# Altium PCB PCB_FFC.PcbDoc
Units mm, origin at the board's own origin, x right, y up, seen from the top; angles counter-clockwise.
Board outline 37 x 16 mm, 2 copper layers (Top Layer, Bottom Layer); 3 components, 18 nets, 46 pads, 29 vias.
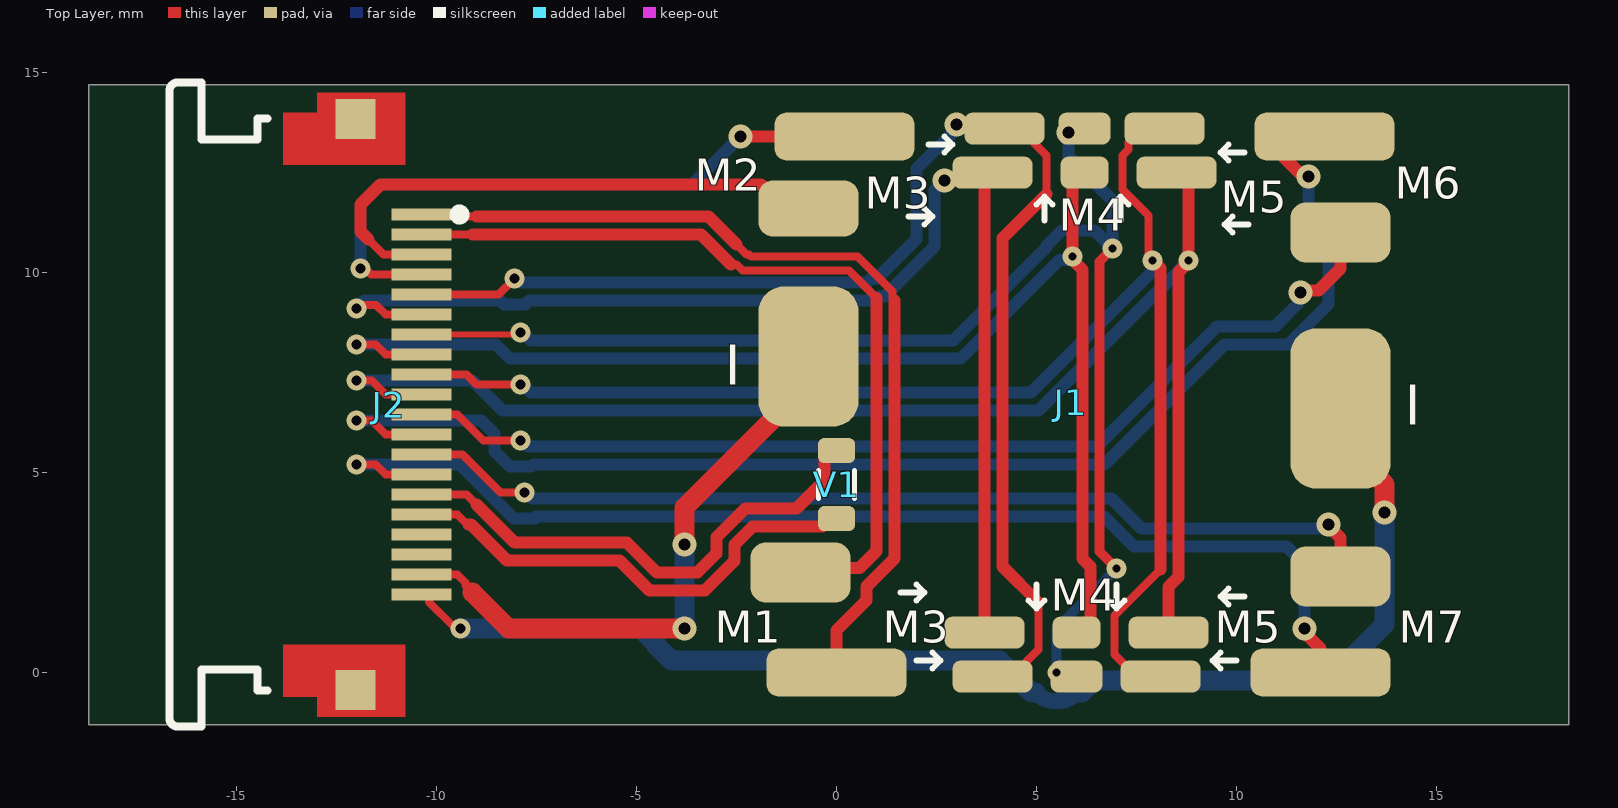
[diagram p0: Top Layer view]
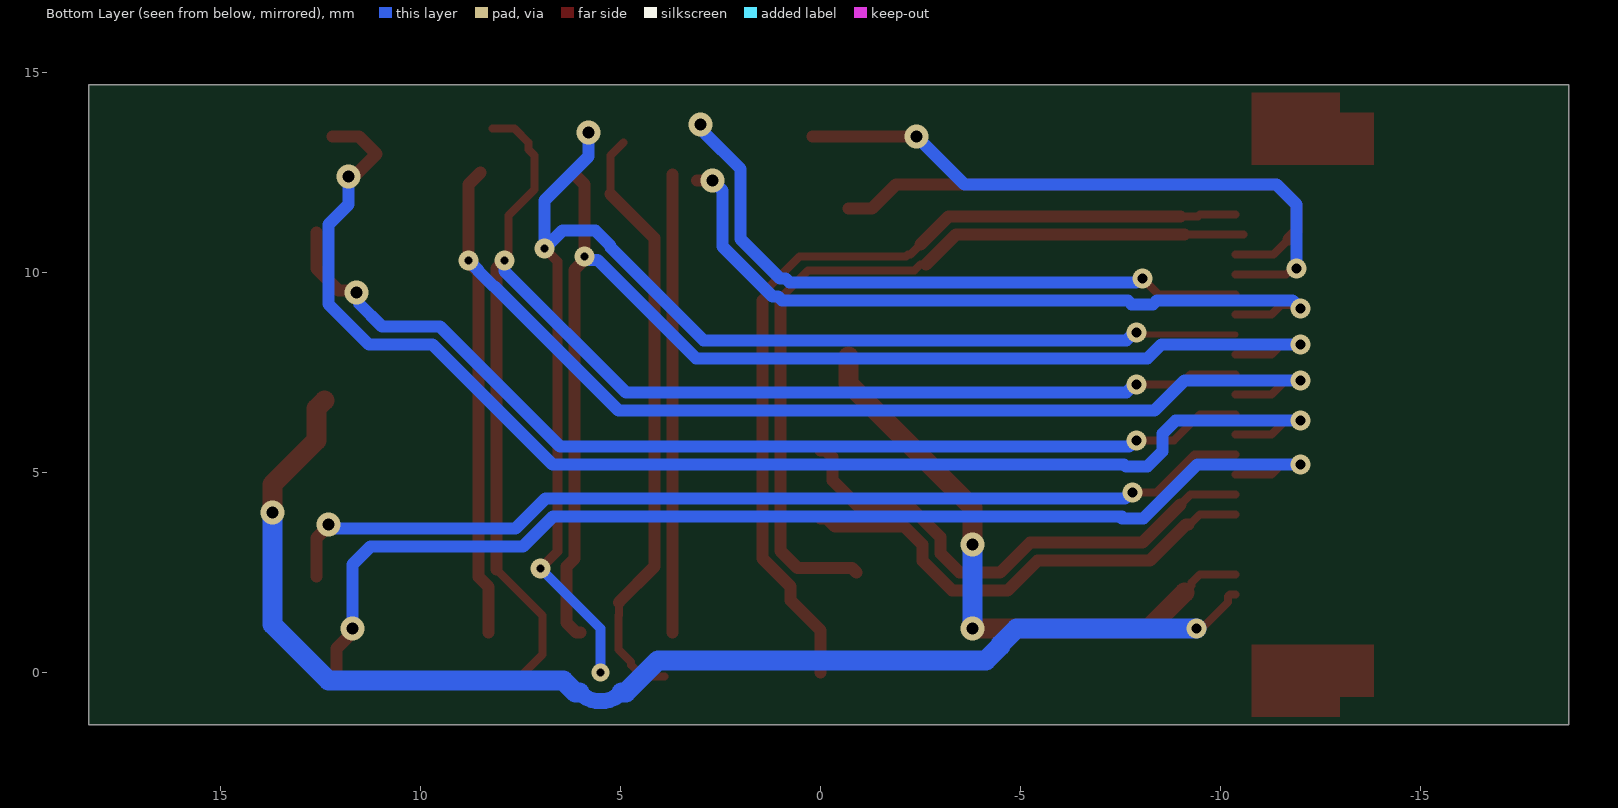
[diagram p1: Bottom Layer view, seen from below]

## Layer stack, top to bottom
Top Solder: solder mask 0.01, Solder Resist, Dk 3.5
Top Layer: signal copper 0.036
Dielectric 1: dielectric 0.32, FR-4, Dk 4.8
Bottom Layer: signal copper 0.036
Bottom Solder: solder mask 0.01, Solder Resist, Dk 3.5

## Board outline
-18.7,14.7 18.3,14.7 18.3,-1.3 -18.7,-1.3

## Design rules (kind name [scope] priority, off if disabled: settings)
Clearance [All] p1: gap=0.25 ignorepadtopadclearanceinfootprint=FALSE except(0: Arc-Hole Track-Hole SMDPad-Hole THPad-Hole Via-Hole Fill-Hole Poly-Hole Region-Hole Text-Hole; 0.15: Arc-Arc Arc-Track Track-Track; 0.2: SMDPad-SMDPad)
HoleSize [All] p1: absolutevalues=TRUE maxlimit=6.3 minlimit=0.2 maxpercent=80.000 minpercent=20.000
MinimumAnnularRing [All] p1: minimumring=0.13
MinimumSolderMaskSliver [All] p1 off: minsoldermaskwidth=0.254
PolygonConnect [All] p1: connectstyle=Relief reliefconductorwidth=0.254 reliefentries=4 polygonreliefangle="90 Angle" airgapwidth=0.254
RoutingVias [All] p1: holewidth=0.3 width=0.6 viastyle="Through Hole" minholewidth=0.2 minwidth=0.45 maxholewidth=6.3 maxwidth=6.7
SilkToSilkClearance [All] p1: silktosilkclearance=0.15
SilkToSolderMaskClearance [IsPad] p1: minsilkscreentomaskgap=0.15 clearancetoexposedcopper=TRUE
SolderMaskExpansion [All] p1: expansion=0.102 istentingtop=FALSE useseparateexpansions=TRUE expansionbottom=0.102 istentingbottom=TRUE
Width [All] p1: maxlimit=0.5 minlimit=0.15 preferedwidth=0.3 minimp=50.000000 maximp=50.000000 favimp=50.000000
26 further rules are at their usual default settings.

## Classes and differential pairs
net class [1..16]: 1 2 3 4 5 6 7 8 9 10 11 12 13 14 15 16

## Components (designator, comment, footprint, x,y, rotation, side; value= is the part's Value field where it differs from the comment)
J1 "sample_contact_place" sample 5.9,6.7 r0 top
J2 "52745-2097" MOLX-52745-2097 -11.2,6.7 r270 top
V1 "Varicap" DIOC160X80X70L20N 0,4.7 r90 top

## Footprints (in the part's own frame and the unit in brackets; to place one, negate y for a bottom-side part, rotate by r counter-clockwise, add the part's x,y. Pads: shape width x height; smd on the part's side, far side on the other; paste and mask are expansions set on the pad)
DIOC160X80X70L20N [mm] "Diode, Chip; 1.60 mm L X 0.80 mm W X 0.70 mm H body"
  rrect51% 0.63x0.93 smd: A(0.85,0) C(-0.85,0)
  silkscreen extent -0.36,-0.45 0.36,0.45, body extent -0.8,-0.4 0.8,0.4, height 0.7
MOLX-52745-2097 [mm] "FPC Connector, 20-Leads, Right Angle, Pitch 0.5 mm, Mated Height 2.0 mm, SMT"
  rect 0.3x1.5 smd: 1(-4.75,0.824) 2(-4.25,0.824) 3(-3.75,0.824) 4(-3.25,0.824) 5(-2.75,0.824) 6(-2.25,0.824) 7(-1.75,0.824) 8(-1.25,0.824) 9(-0.75,0.824) 10(-0.25,0.824) 11(0.25,0.824) 12(0.75,0.824) 13(1.25,0.824) 14(1.75,0.824) 15(2.25,0.824) 16(2.75,0.824) 17(3.25,0.824) 18(3.75,0.824) 19(4.25,0.824) 20(4.75,0.824)
  rect 1x1 smd: MP1(-7.134,-0.824) MP2(7.134,-0.824)
  Top Layer region: -7.8,0.424 -6,0.424 -6,-2.626 -7.3,-2.626 -7.3,-1.777 -7.8,-1.777
  Top Layer region: 6,0.424 7.8,0.424 7.8,-1.777 7.3,-1.777 7.3,-2.626 6,-2.626
  silkscreen extent -8.05,-5.48 8.05,1.9, body extent -8.05,-5.48 8.05,0.92, height 2.01
sample [mm]
  rrect50% 3.5x1.2 smd: 1(-5.9,-6.7) 4(-5.7,6.7) 12(6.3,6.7) 14(6.2,-6.7)
  rrect50% 2.5x1.5 smd: 2(-6.8,-4.2) 11(6.7,4.3) 13(6.7,-4.3)
  rrect50% 2.5x1.4 smd: 3(-6.6,4.9)
  rrect50% 2x0.8 smd: 5(-2,-6.8) 5(-1.7,6.9) 6(-2.2,-5.7) 6(-2,5.8) 9(2.2,-6.8) 9(2.3,6.9) 10(2.4,-5.7) 10(2.6,5.8)
  rrect50% 1.3x0.8 smd: 7(0.1,-6.8) 7(0.3,6.9)
  rrect50% 1.2x0.8 smd: 8(0.1,-5.7) 8(0.3,5.8)
  rrect50% 2.5x3.5 smd: 15(-6.6,1.2)
  rrect50% 2.5x4 smd: 16(6.7,-0.1)
  silkscreen extent -4.3,-6.6 4.4,6.7, body extent -5,-5 5,5, height 1

## Part data
J2: "0.5 mm Pitch Easy-On(TM) Type FPC Connector, 2.0 mm Mated Height, Right Angle, ZIF, SMT, Top Contact, 20 Circuits, -20 to 85 degC, ELV and RoHS Compliant, Tape and Reel", Current (Max per Contact)=0.5A, Manufacturer=Molex, Voltage (Max)=50V, Circuits (Loaded)=20, ComponentLink1Description="Manufacturer URL", ComponentLink1URL=http://www.molex.com/molex/index.jsp, ComponentLink2Description=Datasheet, ComponentLink2URL=http://www.molex.com/webdocs/datasheets/pdf/en-us/0527452097_FFC_FPC_CONNECTORS.pdf, ComponentLink3Description="Package Specification", ComponentLink3URL=http://www.molex.com/pdm_docs/sd/527452097_sd.pdf, Contact Position=Top, Durability (mating cycles max)=20, Entry Angle="90degrees Angle", Mated Height=2.00mm, Material - Metal="Phosphor Bronze", Material - Plating Mating=Gold, Material - Plating Termination=Gold, Mounting Technology="Surface Mount", Number of Rows=1, Orientation="Right Angle", PackageDescription="20-Lead FPC Connector, Pitch 0.5 mm", PackageReference=52745-2097, PackageVersion="Rev. C, 07/2010", Packing="Tape and Reel", PartNumber=52745-2097, PCB Locator=No, PCB Retention=Yes, Pitch - Mating Interface=0.50mm, Polarized to PCB=Yes, RoHS=TRUE, Stackable=No

## Via types
v1: diameter 0.5, hole 0.25, Top Layer to Bottom Layer, tented bottom, 12 vias
v2: diameter 0.6, hole 0.3, Top Layer to Bottom Layer, tented bottom, 11 vias
v3: diameter 0.5, hole 0.2, Top Layer to Bottom Layer, tented bottom, 5 vias
v4: diameter 0.45, hole 0.2, Top Layer to Bottom Layer, tented bottom, 1 vias

## Nets (pads, with @x,y where several pads share a name; then routed paths per layer and width w, separated by ;. In a path a pad name is that pad's centre, name@x,y a point inside that pad or via, vN(x,y) a via of type N, cw(c..) or ccw(c..) an arc to the next point about the centre after c; other vN are vias at no path point)
1: J1.1 J2.1 | length 22.8
  Top Layer w0.2: J2.1 -9.482,11.45 -9.432,11.4 -9,11.4 -8.95,11.45 ; -2.5,10.7 -2.25,10.45 -2.184,10.45 -2.134,10.4 0.528,10.4 1.4,9.528 1.4,9.35 1.45,9.3
  Top Layer w0.3: -9,11.4 -3.2,11.4 -2.5,10.7 ; J1.1 0,1.054 0.75,1.804 0.75,2.15 1.45,2.85 1.45,9.3
2: J1.2 J2.2 | length 21.5
  Top Layer w0.2: J2.2@-10.576,10.95 -9.1,10.95 -8.3,10.95 ; -2.636,10.2 -2.495,10.2 -2.345,10.05 0.313,10.05 1,9.363
  Top Layer w0.3: -9.1,10.95 -8.3,10.95 -3.386,10.95 -2.636,10.2 ; J1.2 -0.788,2.612 0.576,2.612 1,3.036 1,9.363
3: J1.3 J2.3 | length 14.1
  Top Layer w0.2: -11.7,10.824 -11.326,10.45 J2.3
  Top Layer w0.3: -11.7,10.824 -11.9,11.024 -11.9,11.7 -11.4,12.2 -1.888,12.2 -1.288,11.6 J1.3
4: J1.4 J2.4 | length 16
  Top Layer w0.2: v1(-11.9,10.1) -11.792,10.1 -11.642,9.95 J2.4
  Top Layer w0.3: v2(-2.4,13.4) J1.4
  Bottom Layer w0.3: v1(-11.9,10.1) -11.9,11.7 -11.4,12.2 -3.6,12.2 v2(-2.4,13.4)
5: J1.5 J2.5 | length 31.5
  Top Layer w0.2: J2.5 -8.45,9.45 v1(-8.046,9.854) ; J1.5@3.9,-0.1 4.446,-0.1 4.738,0.192 4.738,0.26 5.05,0.572 5.05,1.428 5.044,1.434 5.044,1.756 ; J1.5@4.928,13.25 5.25,12.928 5.25,12.072 5.25,11.961
  Top Layer w0.3: v2@2.881,13.7 v2(3,13.7) ; 5.044,1.756 4.15,2.65 4.15,10.861 5.25,11.961
  Bottom Layer w0.3: v1(-8.046,9.854) -7.992,9.854 -7.888,9.75 0.772,9.75 0.872,9.85 1.014,9.85 2,10.836 2,12.59 2.887,13.477 2.887,13.506 3,13.619 v2(3,13.7)
6: J1.6 J2.6 | length 30.5
  Top Layer w0.2: v1(-12,9.1) -11.908,9.192 -11.513,9.192 -11.271,8.95 J2.6
  Top Layer w0.3: v2(2.7,12.3) J1.6@3.09,12.3 ; J1.6@3.7,1 J1.6@3.7,12.448
  Bottom Layer w0.3: v1(-12,9.1) -11.8,9.3 -8.412,9.3 -8.316,9.204 -7.777,9.204 -7.681,9.3 0.959,9.3 1.059,9.4 1.2,9.4 2.45,10.65 2.45,12.05 v2(2.7,12.3)
7: J1.7 J2.7 | length 33.6
  Top Layer w0.15: J2.7 -7.95,8.45 v1(-7.9,8.5)
  Top Layer w0.25: v3(6.9,10.6) 6.575,10.275 6.575,3.024 v3(7,2.599)
  Bottom Layer w0.25: v4(5.5,0) 5.5,1.098 v3(7,2.599)
  Bottom Layer w0.3: v1(-7.9,8.5) -7.846,8.5 -7.646,8.3 2.922,8.3 5.25,10.628 5.25,10.669 5.631,11.05 6.45,11.05 v3(6.9,10.6) 6.9,11.8 5.8,12.9 v2(5.8,13.5)
8: J1.8 J2.8 | length 32.8
  Top Layer w0.2: v1(-12,8.2) -11.521,8.2 -11.271,7.95 J2.8
  Top Layer w0.3: J1.8@6,1 6.104,1 6.35,1.246 6.35,2.647 6.15,2.847 6.15,10.069 5.992,10.227 5.992,10.254 5.9,10.346 5.9,12.2 J1.8@6.2,12.5
  Bottom Layer w0.3: v1(-12,8.2) -8.519,8.2 -8.169,7.85 3.109,7.85 5.576,10.317 5.763,10.317 5.846,10.4 v3(5.9,10.4)
9: J1.9 J2.9 | length 36.1
  Top Layer w0.2: J2.9 -9.25,7.45 -9,7.2 v1(-7.9,7.2) ; v3(7.9,10.3) 7.8,10.4 7.8,11.422 7.15,12.072 7.15,12.928 7.3,13.078 7.3,13.246 7.654,13.6 J1.9@8.2,13.6 ; J1.9@8.1,-0.1 7.5,-0.1 6.95,0.45 6.95,1.428 8.1,2.578
  Top Layer w0.3: v3(7.9,10.3) 8.1,10.1 8.1,2.578
  Bottom Layer w0.3: v1(-7.9,7.2) -7.846,7.2 -7.646,7 4.864,7 7.899,10.035 v3(7.9,10.3) v3(7.9,10.3)
10: J1.10 J2.10 | length 36.3
  Top Layer w0.2: v1(-12,7.3) -11.621,7.3 -11.271,6.95 J2.10
  Top Layer w0.3: J1.10@8.3,1 8.3,2.141 8.55,2.391 8.55,10.012 8.8,10.262 v3(8.8,10.3) 8.8,12.2 J1.10@8.5,12.5
  Bottom Layer w0.3: v1(-12,7.3) -9.1,7.3 -8.35,6.55 5.05,6.55 8.15,9.65 8.169,9.65 8.55,10.031 8.55,10.05 v3(8.8,10.3)
11: J1.11 J2.11 | length 26.2
  Top Layer w0.2: J2.11 -9.482,6.45 -8.832,5.8 v1(-7.9,5.8)
  Top Layer w0.3: v2(11.6,9.5) 11.65,9.55 12.05,9.55 12.6,10.1 J1.11
  Bottom Layer w0.3: v1(-7.9,5.8) -7.862,5.8 -7.712,5.65 6.514,5.65 9.514,8.65 10.962,8.65 11.543,9.23 11.543,9.443 v2(11.6,9.5)
12: J1.12 J2.12 | length 34.1
  Top Layer w0.2: v1(-12,6.3) -11.621,6.3 -11.271,5.95 J2.12
  Top Layer w0.3: v2(11.8,12.4) 11.661,12.4 11.1,12.961 11.539,13.4 J1.12
  Bottom Layer w0.3: v1(-12,6.3) -8.878,6.3 -8.55,5.972 -8.55,5.531 -8.169,5.15 -7.631,5.15 -7.581,5.2 6.7,5.2 9.7,8.2 11.29,8.2 12.3,9.21 12.3,11.2 11.8,11.7 v2(11.8,12.4)
13: J1.13 J2.13 | length 24.9
  Top Layer w0.2: J2.13 -9.35,5.45 -8.4,4.5 v1(-7.8,4.5)
  Top Layer w0.3: v2(12.3,3.7) 12.3,3.664 12.6,3.364 J1.13
  Bottom Layer w0.3: v1(-7.8,4.5) -7.762,4.5 -7.612,4.35 6.875,4.35 7.625,3.6 12.119,3.6 12.219,3.7 v2(12.3,3.7)
14: J1.14 J2.14 | length 29.6
  Top Layer w0.2: v1(-12,5.2) -11.521,5.2 -11.271,4.95 J2.14
  Top Layer w0.3: v2(11.7,1.1) 11.6,1.1 12.1,0.6 J1.14
  Bottom Layer w0.3: v1(-12,5.2) -9.419,5.2 -8.069,3.85 -7.531,3.85 -7.481,3.9 ; -7.531,3.9 6.688,3.9 7.438,3.15 11.25,3.15 11.7,2.7 v2(11.7,1.1)
15: J1.15 J2.19 | length 15.3
  Top Layer w0.2: J2.19 -9.482,2.45 -9.276,2.245 -9.276,2.176 -9.1,2
  Top Layer w0.5: -9.1,2 -8.2,1.1 v2(-3.8,1.1) ; v2(-3.8,3.2) -3.8,4.128 -0.7,7.228 J1.15
  Bottom Layer w0.5: v2(-3.8,1.1) v2(-3.8,3.2)
16: J1.16 J2.20 | length 32.2
  Top Layer w0.2: J2.20 -10.235,1.95 -10.185,1.9 -10.185,1.759 -9.584,1.157 -9.457,1.157 v1(-9.4,1.1)
  Top Layer w0.5: J1.16@12.4,6.8 J1.16 12.6,5.804 13.7,4.704 v2(13.7,4)
  Bottom Layer w0.4: 4.975,-0.5 ccw(c5.5,0.025) 5.5,-0.718 ccw(c5.5,0.025) 6.025,-0.5
  Bottom Layer w0.5: v1(-9.4,1.1) -4.9,1.1 -4.5,0.7 -4.5,0.669 -4.131,0.3 4.069,0.3 4.869,-0.5 4.975,-0.5 ; 6.025,-0.5 6.131,-0.5 6.431,-0.2 12.3,-0.2 13.7,1.2 v2(13.7,4)
NetJ2_15: J2.15 V1.A | length 13
  Top Layer w0.2: J2.15 -9.25,4.45 -9,4.2
  Top Layer w0.3: -9,4.2 -8.05,3.25 -5.24,3.25 -4.49,2.5 -3.478,2.5 -3,2.978 -3,3.382 -2.281,4.101 -1,4.101 -0.299,4.803 -0.299,5.386 -0.135,5.55 V1.A
NetJ2_16: J2.16 V1.C | length 12.1
  Top Layer w0.2: J2.16 -9.482,3.95 -9.232,3.7 -9.2,3.7
  Top Layer w0.3: -9.2,3.7 -9.136,3.7 -8.236,2.8 -5.426,2.8 -4.676,2.05 -3.291,2.05 -2.55,2.791 -2.55,3.196 -2.096,3.65 -0.356,3.65 -0.156,3.85 V1.C
pads on no net: J2.17 J2.18 J2.MP1 J2.MP2

## Silkscreen, mask and mechanical layers (free items; w line width, h text height)
Mechanical 1:
  lines w0.15: -18.7,14.7 18.3,14.7 18.3,-1.3 -18.4,-1.3 ; -17.9,-1.3 -17.6,-1.3

## Text inside footprints (layer, text, board x,y; h text height)
J1: Top Overlay "M5" at 9.45,0.75 h0.8; Top Overlay "M7" at 14.05,0.75 h0.8; Top Overlay "M6" at 13.95,11.85 h0.8; Top Overlay "M4" at 5.55,11.05 h0.8; Top Overlay "M3" at 0.7,11.6 h0.8; Top Overlay "M1" at -3.05,0.75 h0.8; Top Overlay "M2" at -3.55,12.05 h0.8; Top Overlay "M3" at 1.15,0.75 h0.8; Top Overlay "M4" at 5.35,1.55 h0.8; Top Overlay "M5" at 9.6,11.5 h0.8; Top Overlay "I" at -2.8,7.2 h1; Top Overlay "I" at 14.2,6.2 h1